# EAGLE board oshcamp23_badge_rev_a2_single_sheet (EAGLE 9.6.2)
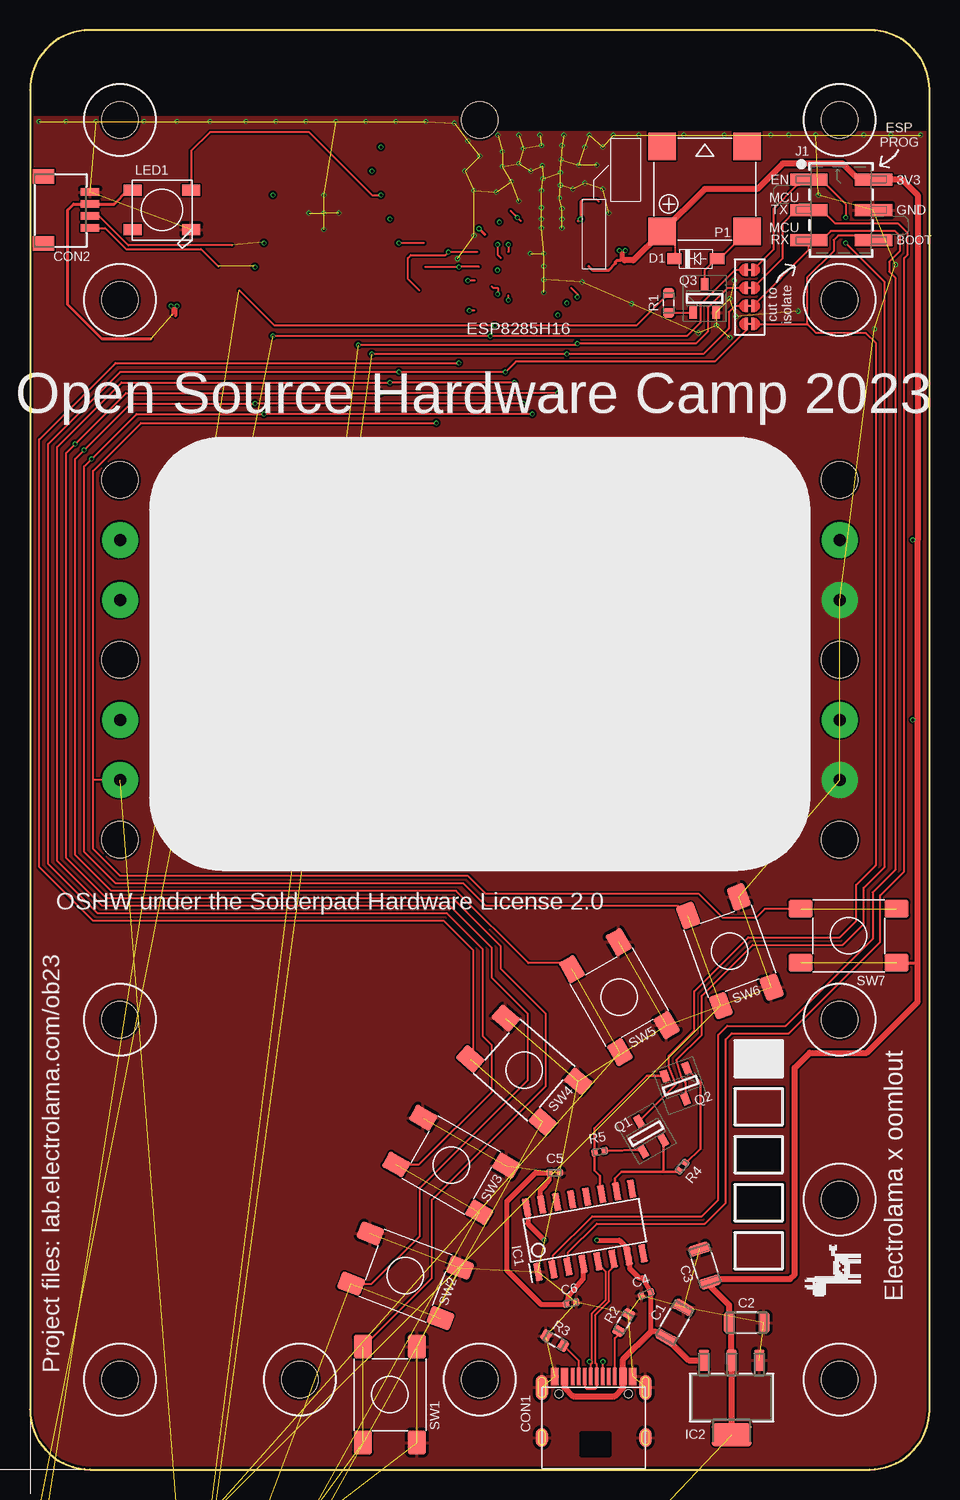
[diagram p0: board, top side]
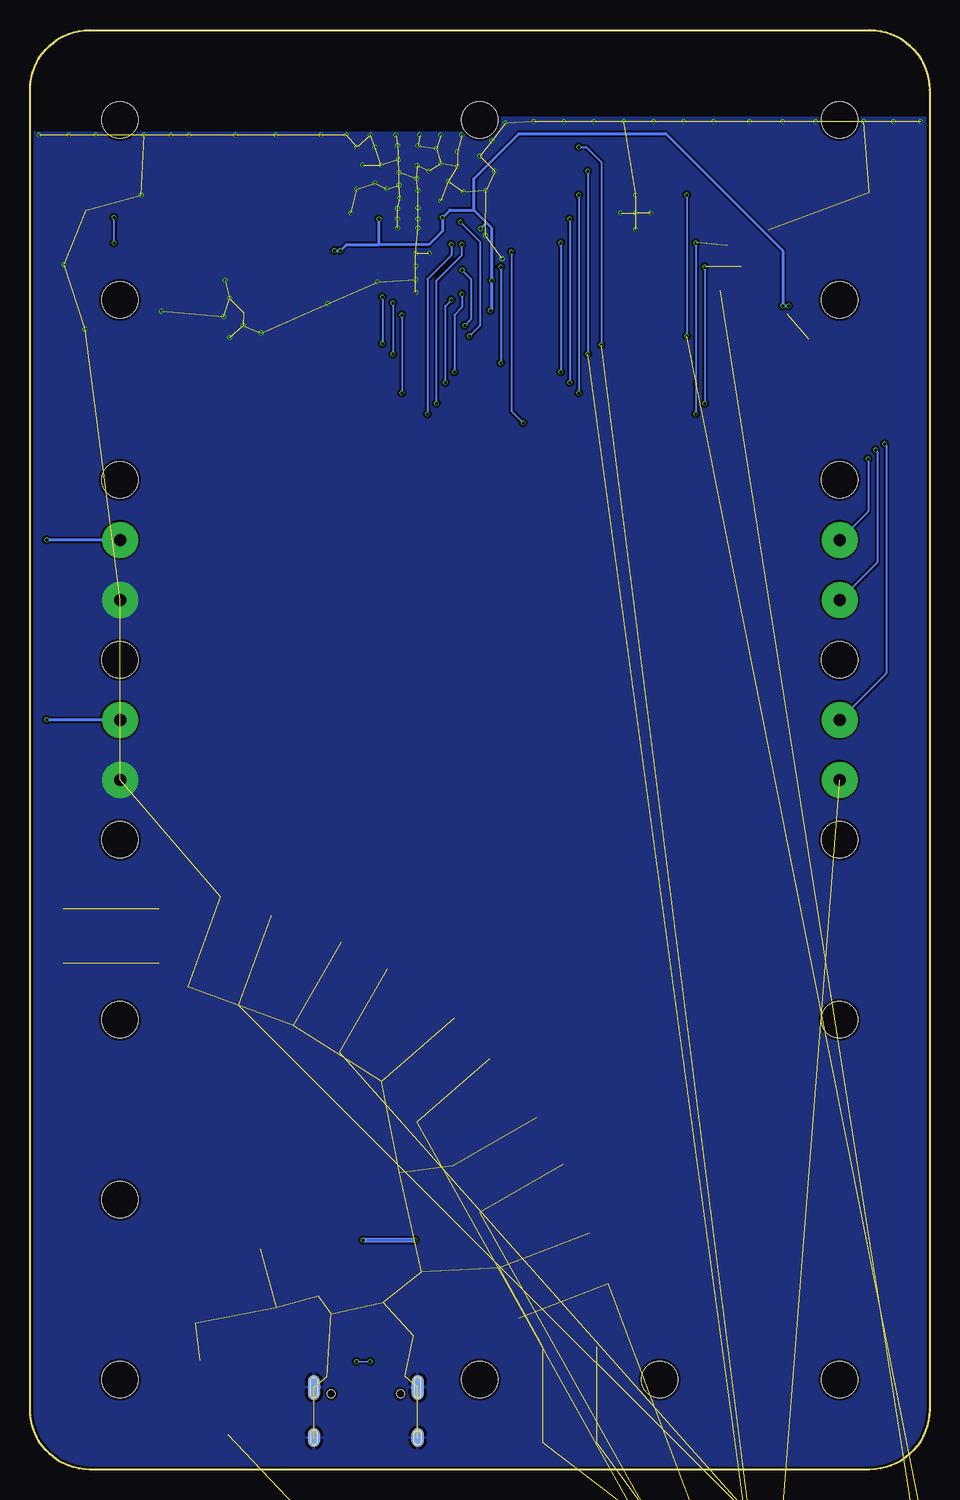
[diagram p1: board, bottom side, seen from below]

Size 75 x 120 mm. Coordinates in mm from the lower left corner, seen from the top.
Outline: 70,120 5,120 arc90 0,115 0,5 arc90 5,0 70,0 arc90 75,5 75,115 arc90 70,120
Copper layers (1*16): Top 0.035mm / dielectric 1.6mm / Bottom 0.035mm
Design rules "jlcpcb-2layers *": minimum track width 5mil, minimum drill 0.3mm, track to track 5mil, track to pad 5mil, pad to pad 5mil, via to via 5mil, smd to smd 5mil, copper to edge 0.2mm, drill to drill 6mil, minimum pad ring 10mil, minimum via ring 3mil, stop-mask expansion 4mil, vias tented up to drill 100mil, thermal gap 10mil
Holes 3.05 mm at 7.5,7.5 22.5,7.5 37.5,7.5 67.5,7.5 67.5,22.5 67.5,37.5 67.5,97.5 67.5,112.5 7.5,112.5 7.5,97.5 7.5,37.5 67.5,82.5 67.5,67.5 67.5,52.5 7.5,82.5 7.5,67.5 7.5,52.5 37.5,112.5
tRestrict: area 58.7,20.7 to 62.8,23.8; area 58.9,24.9 to 62.6,27.6; area 46,1.2 to 48.2,3

## Footprints (pad centres in the part's own frame; a part is rotated, then mirrored left to right if it is on the bottom)
YAGEO-ANT3216LL00R2400A = smd 1.8 x 0.6: S1 0,2.15; S2 0,5.35
_PKG_C_1206 = smd 0.9 x 1.7: 1 -1.45,0; 2 1.45,0
_PKG_C_0402 = smd 0.54 x 0.6: 1 -0.43,0; 2 0.43,0
_PKG_C_0402_NOTHERMALS = smd 0.54 x 0.6: 1 -0.43,0; 2 0.43,0
USBC_C-31-M-12 = smd 0.3 x 1.45: CC1 -1.25,3.005; CC2 1.75,3.005; DN1 0.25,3.005; DN2 -0.75,3.005; DP1 -0.25,3.005; DP2 0.75,3.005; SBU1 1.25,3.005; SBU2 -1.75,3.005 | smd 0.6 x 1.45: GND@1 -3.25,3.005; GND@2 3.25,3.005; VBUS@1 -2.45,3.005; VBUS@2 2.45,3.005 | smd 1 x 2.1: P$1 4.32,2.09; P$2 -4.32,2.09 | smd 1 x 1.6: P$3 -4.32,-2.09; P$4 4.32,-2.09 | smd 1 x 2.1 bottom: P$5 -4.32,2.09; P$8 4.32,2.09 | smd 1 x 1.6 bottom: P$6 -4.32,-2.09; P$7 4.32,-2.09 | hole 0.65: 2.89,1.56; -2.89,1.56
JST_SH4 = smd 0.6 x 1.55: 1 -1.5,2.514; 2 -0.5,2.514; 3 0.5,2.514; 4 1.5,2.514 | smd 1.2 x 1.8: MT1 -2.8,-1.386; MT2 2.8,-1.386
_PKG_SOD123 = smd 1.2 x 0.9: 1 -1.775,0; 2 1.775,0
_PKG_SOP16 = smd 0.61 x 1.524: 1 -4.445,-2.794; 2 -3.175,-2.794; 3 -1.905,-2.794; 4 -0.635,-2.794; 5 0.635,-2.794; 6 1.905,-2.794; 7 3.175,-2.794; 8 4.445,-2.794; 9 4.445,2.667; 10 3.175,2.667; 11 1.905,2.667; 12 0.635,2.667; 13 -0.635,2.667; 14 -1.905,2.667; 15 -3.175,2.667; 16 -4.445,2.667
_PKG_SOT223-4_TI-DCY4 = smd 0.889 x 1.765: 1 -2.311,-3.118; 2 0,-3.118; 3 2.311,-3.118 | smd 3.302 x 1.905: 4 0,3.124
QFN50P500X500X90-33N = smd 0.8 x 0.3: 1 -2.5,1.75; 2 -2.5,1.25; 3 -2.5,0.75; 4 -2.5,0.25; 5 -2.5,-0.25; 6 -2.5,-0.75; 7 -2.5,-1.25; 8 -2.5,-1.75; 17 2.5,-1.75; 18 2.5,-1.25; 19 2.5,-0.75; 20 2.5,-0.25; 21 2.5,0.25; 22 2.5,0.75; 23 2.5,1.25; 24 2.5,1.75 | smd 0.3 x 0.8: 9 -1.75,-2.5; 10 -1.25,-2.5; 11 -0.75,-2.5; 12 -0.25,-2.5; 13 0.25,-2.5; 14 0.75,-2.5; 15 1.25,-2.5; 16 1.75,-2.5; 25 1.75,2.5; 26 1.25,2.5; 27 0.75,2.5; 28 0.25,2.5; 29 -0.25,2.5; 30 -0.75,2.5; 31 -1.25,2.5; 32 -1.75,2.5 | smd 3.75 x 3.75: 33 0,0
61030621121 = smd 1 x 3.1: 1 -2.54,-2.7; 2 -2.54,2.7; 3 0,-2.7; 4 0,2.7; 5 2.54,-2.7; 6 2.54,2.7
_PKG_L_0402 = smd 0.54 x 0.6: 1 -0.43,0; 2 0.43,0
WS2812B = smd 1.5 x 0.9: 1-VDD 2.45,-1.65; 2-DOUT 2.45,1.65; 3-GND -2.45,1.65; 4-DIN -2.45,-1.65
ESP-12S = smd 2 x 1.2: ADC -7.9,1.5; EN -7.9,-0.5; GND 7.9,-10.5; IO0 7.9,-4.5; IO2 7.9,-6.5; IO4 7.9,-2.5; IO5 7.9,-0.5; IO12 -7.9,-6.5; IO13 -7.9,-8.5; IO14 -7.9,-4.5; IO15 7.9,-8.5; IO16 -7.9,-2.5; RST -7.9,3.5; RXD/IO3 7.9,1.5; TXD/IO1 7.9,3.5; VCC -7.9,-10.5 | smd 3.6 x 3.6: EPAD -0.5,-2
MLT-8530 = smd 2.3 x 2.3: + -3.55,3.55; - -3.55,-3.55; DUMMY1 3.55,3.55; DUMMY2 3.55,-3.55
SOT96P237X111-3N = smd 1 x 0.6: 1 -1.2,0.955; 2 -1.2,-0.955; 3 1.2,0
_PKG_R_0603 = smd 0.79 x 0.93: 1 -0.82,0; 2 0.82,0
_PKG_R_0402 = smd 0.54 x 0.6: 1 -0.43,0; 2 0.43,0
SJ-SHORT = smd 0.254 x 1.016: 1 -0.254,0; 2 0.254,0 | smd 0.508 x 0.152: S 0,0
GENERIC_SPNO_4P_6X6MM = smd 2 x 1.5: P$1 -4,2.25; P$2 4,2.25; P$3 -4,-2.25; P$4 4,-2.25
XTAL-4P-2016 = smd 0.95 x 0.85: 1 -0.725,-0.575; 2 0.725,-0.575; 3 0.725,0.575; 4 -0.725,0.575

## Placement (x,y rotation side)
ANT2  ANT3216LL00R2400A  [YAGEO-ANT3216LL00R2400A]  22.25,-13.75 0 top  (outside the outline)
C1  47u  [_PKG_C_1206]  53.75,12.25 60 top
C2  47u  [_PKG_C_1206]  59.75,12.25 0 top
C3  47u  [_PKG_C_1206]  56.25,17 108 top
C4  100n  [_PKG_C_0402]  51.38,14.62 200 top
C5  100n  [_PKG_C_0402]  43.75,24.75 0 top
C6  100n  [_PKG_C_0402]  45.12,13.88 10 top
C21  TBD  [_PKG_C_0402_NOTHERMALS]  14,-42.25 0 top  (outside the outline)
C22  TBD  [_PKG_C_0402_NOTHERMALS]  16.5,-42.25 0 top  (outside the outline)
C23  8p  [_PKG_C_0402]  19,-42.25 0 top  (outside the outline)
C24  8p  [_PKG_C_0402]  21.5,-42.25 0 top  (outside the outline)
C25  4u7  [_PKG_C_0402_NOTHERMALS]  24,-42.25 0 top  (outside the outline)
C26  100n  [_PKG_C_0402_NOTHERMALS]  26.5,-42.25 0 top  (outside the outline)
C27  4u7  [_PKG_C_0402_NOTHERMALS]  -5.5,-45.25 0 top  (outside the outline)
C28  100n  [_PKG_C_0402_NOTHERMALS]  -3,-45.25 0 top  (outside the outline)
C29  100n  [_PKG_C_0402_NOTHERMALS]  -0.5,-45.25 0 top  (outside the outline)
C30  100n  [_PKG_C_0402_NOTHERMALS]  2,-45.25 0 top  (outside the outline)
C31  100n  [_PKG_C_0402]  4.5,-45.25 0 top  (outside the outline)
C32  100n  [_PKG_C_0402_NOTHERMALS]  7,-45.25 0 top  (outside the outline)
C33  47u  [_PKG_C_1206]  21,-33 0 top  (outside the outline)
C34  47u  [_PKG_C_1206]  26,-33 0 top  (outside the outline)
CON1  [USBC_C-31-M-12]  47,4.75 0 top
CON2  STEMMA_I2C_QT  [JST_SH4]  2.5,105 270 top
D1  [_PKG_SOD123]  55.5,100.94 0 top
IC1  [_PKG_SOP16]  46.25,20 10 top
IC2  LD1117-3.3  [_PKG_SOT223-4_TI-DCY4]  58.5,6 180 top
IC4  WMCU-ESP8285H16  [QFN50P500X500X90-33N]  2.25,-36 0 top  (outside the outline)
J1  61030621121  [61030621121]  67.62,105 270 top
L2  TBD  [_PKG_L_0402]  9.5,-45.25 0 top  (outside the outline)
LED1  WS2812B5050  [WS2812B]  11,105 180 top
MOD2  ESP-12S  [ESP-12S]  6,-16.25 0 top  (outside the outline)
P1  Buzzer  [MLT-8530]  56.25,106.75 90 top
Q1  SS8050  [SOT96P237X111-3N]  51.38,28 120 top
Q2  SS8050  [SOT96P237X111-3N]  54.25,32 290 top
Q3  SS8050  [SOT96P237X111-3N]  56.25,97.62 90 top
R1  220  [_PKG_R_0603]  53.25,97.25 90 top
R2  5k1  [_PKG_R_0603]  49.5,12.25 240 top
R3  5k1  [_PKG_R_0603]  43.75,10.75 330 top
R4  12k 1%  [_PKG_R_0402]  54.38,25.25 50 top
R5  12k 1%  [_PKG_R_0402]  47.5,26.5 190 top
R12  12k 1%  [_PKG_R_0402]  -5.5,-42.25 0 top  (outside the outline)
R13  12k 1%  [_PKG_R_0402]  -2.25,-42.25 0 top  (outside the outline)
R14  12k 1%  [_PKG_R_0402]  1,-42.25 0 top  (outside the outline)
R15  12k 1%  [_PKG_R_0402]  4.25,-42.25 0 top  (outside the outline)
R16  12k 1%  [_PKG_R_0402]  7.5,-42.25 0 top  (outside the outline)
R17  12k 1%  [_PKG_R_0402]  10.75,-42.25 0 top  (outside the outline)
SJ1  [SJ-SHORT]  60,100 0 top
SJ2  [SJ-SHORT]  60,98.5 0 top
SJ3  [SJ-SHORT]  60,97 0 top
SJ4  [SJ-SHORT]  60,95.5 180 top
SW1  [GENERIC_SPNO_4P_6X6MM]  30,6.25 90 top
SW2  [GENERIC_SPNO_4P_6X6MM]  31.3,16.15 159 top
SW3  [GENERIC_SPNO_4P_6X6MM]  35.12,25.38 150 top
SW4  [GENERIC_SPNO_4P_6X6MM]  41.2,33.3 139 top
SW5  [GENERIC_SPNO_4P_6X6MM]  49.13,39.38 120 top
SW6  [GENERIC_SPNO_4P_6X6MM]  58.35,43.2 110 top
SW7  [GENERIC_SPNO_4P_6X6MM]  68.25,44.5 0 top
XT2  26MHz  [XTAL-4P-2016]  13.25,-34 0 top  (outside the outline)

## Library data of the parts
ANT2 = ok-rf-dev; JLCASSY: C293767
C1-C3 C33 C34 = ok-discretes-dev; JLCASSY: C96123; MPN: CL31A476MPHNNNE
C4-C6 C26 C28-C32 = ok-discretes-dev; JLCASSY: C307331
C21 C22 L2 = ok-discretes-dev
C23 C24 = ok-discretes-dev; JLCASSY: C1578
C25 C27 = ok-discretes-dev; JLCASSY: C23733
CON1 = ok-connectors-dev; JLCASSY: C165948
CON2 = microbuilder; JLCASSY: C145956
D1 = ok-discretes-dev; JLCASSY: C81598
IC1 = ok-chips-dev; JLCASSY: C2844153
IC2 = ok-chips-dev; JLCASSY: C6186
IC4 = ok-chips-dev; DESCRIPTION: IC RF TXRX+MCU WIFI 32VFQFN; HEIGHT: 0.9mm; JLCASSY: C967019; MANUFACTURER_NAME: Espressif Systems; MANUFACTURER_PART_NUMBER: ESP8285H16; MOUSER_PART_NUMBER: 356-ESP8285H16; MOUSER_PRICE-STOCK: https://www.mouser.co.uk/ProductDetail/Espressif-Systems/ESP8285H16?qs=Cb2nCFKsA8p%2FOZGxIdZOag%3D%3D
J1 = Wurth_Connectors_WR-PHD; DATASHEET-URL: https://www.we-online.com/redexpert/spec/61030621121?ae; GENDER: Pin Header; IR: 3A; JLCASSY: C780054; MOUNT: THT; PACKAGING: Tape and Reel with Cap; PART-NUMBER: 61030621121; PINS: 6; PITCH: 2.54mm; ROWS: Dual; TYPE: Straight
LED1 = adafruit
MOD2 = ok-modules-dev; JLCASSY: C82898
P1 = ok-electromech-dev; JLCASSY: C94599
Q1-Q3 = ok-discretes-dev; ARROW_PART_NUMBER: MMBT5550LT1G; ARROW_PRICE-STOCK: https://www.arrow.com/en/products/mmbt5550lt1g/on-semiconductor?region=nac; HEIGHT: 1.11mm; JLCASSY: C2150; MANUFACTURER_NAME: ON Semiconductor; MANUFACTURER_PART_NUMBER: MMBT5550LT1G; MOUSER_PART_NUMBER: 863-MMBT5550LT1G; MOUSER_PRICE-STOCK: https://www.mouser.co.uk/ProductDetail/onsemi/MMBT5550LT1G?qs=R2UZ7gjkEjKW3fmkaqXxTw%3D%3D
R1 = ok-discretes-dev; JLCASSY: C22962
R2 R3 = ok-discretes-dev; JLCASSY: C23186
R4 R5 R12-R17 = ok-discretes-dev; JLCASSY: C25752
SJ1-SJ4 = ok-mechanical-dev
SW1-SW7 = ok-electromech-dev; JLCASSY: C620316
XT2 = ok-xtal-osc-dev; JLCASSY: C2762193

## Nets
ANT1: C22.2 IC4.2 L2.2
ANT'1: ANT2.S1 C21.2 L2.1
AUTORST_BOOT: J1.6 Q1.3 SJ4.1
AUTORST_EN: J1.1 Q2.3 SJ1.2
CH343_3V: C5.1 C6.1 IC1.4 IC1.15
DTR: IC1.10 Q1.2 R4.1
EN: IC4.7 MOD2.EN R13.2 SJ1.1
GND: C1.2 C2.2 C3.2 C4.2 C5.2 C6.2 C21.1 C22.1 C23.1 C24.1 C25.1 C26.1 C27.1 C28.1 C29.1 C30.1 C31.2 C32.1 C33.2 C34.2 CON1.GND@1 CON1.GND@2 CON1.P$1 CON1.P$2 CON1.P$3 CON1.P$4 CON1.P$5 CON1.P$6 CON1.P$7 CON1.P$8 CON2.1 IC1.1 IC2.1 IC4.33 J1.4 LED1.3-GND MOD2.EPAD MOD2.GND Q3.2 R2.1 R3.1 R12.2 R16.1 SW1.P$3 SW1.P$4 SW2.P$3 SW2.P$4 SW3.P$3 SW3.P$4 SW4.P$3 SW4.P$4 SW5.P$3 SW5.P$4 SW6.P$3 SW6.P$4 XT2.2 XT2.4
IO0: IC4.15 MOD2.IO0 R14.2 SJ4.2 SW3.P$1 SW3.P$2
IO1_TX: IC4.26 MOD2.TXD/IO1 SJ2.1
IO2: IC4.14 MOD2.IO2 R15.2 SW4.P$1 SW4.P$2
IO3_RX: IC4.25 MOD2.RXD/IO3 SJ3.1
IO4: IC4.16 MOD2.IO4 SW2.P$1 SW2.P$2
IO5: IC4.24 LED1.4-DIN MOD2.IO5 SW1.P$1 SW1.P$2
IO12: CON2.4 IC4.10 MOD2.IO12 SW5.P$1 SW5.P$2
IO13: IC4.12 MOD2.IO13 R1.2
IO14: CON2.3 IC4.9 MOD2.IO14 SW6.P$1 SW6.P$2
IO15: IC4.13 MOD2.IO15 R16.2 SW7.P$1 SW7.P$2
N$1: IC4.31 R12.1
N$5: Q1.1 R5.1
N$12: D1.2 P1.- Q3.3
N$13: Q2.1 R4.2
N$16: CON1.CC1 R3.2
N$17: CON1.CC2 R2.2
N$23: Q3.1 R1.1
PC_RX: IC1.3 J1.3 SJ2.2
PC_TX: IC1.2 J1.5 SJ3.2
RST_C: C30.2 IC4.32 R17.1
RST_M: MOD2.RST
RTS: IC1.11 Q2.2 R5.2
USB_N: CON1.DN1 CON1.DN2 IC1.6
USB_P: CON1.DP1 CON1.DP2 IC1.5
VCC: C2.1 C3.1 C25.2 C26.2 C27.2 C28.2 C29.2 C31.1 C32.2 C33.1 C34.1 CON2.2 D1.1 IC2.2 IC2.4 IC4.1 IC4.3 IC4.4 IC4.11 IC4.17 IC4.29 IC4.30 J1.2 LED1.1-VDD MOD2.VCC P1.+ R13.1 R14.1 R15.1 R17.2 SW7.P$3 SW7.P$4
VUSB: C1.1 C4.1 CON1.VBUS@1 CON1.VBUS@2 IC1.7 IC1.16 IC2.3
XTAL_IN: C23.2 IC4.28 XT2.1
XTAL_OUT: C24.2 IC4.27 XT2.3

## Tracks (layer width: path | path; a pad name or v marks a point on that pad's centre or on a via)
ANT1  (2 unrouted)
ANT'1  (2 unrouted)
AUTORST_BOOT
  Top 0.152: Q1.3 53.84,32.11 53.25,33.57 53.25,34.5 55.38,36.62 55.38,39.88 59.88,44.38 67.5,44.38 68.88,45.75 68.88,48.75 70.5,50.38 70.5,93.94 69.69,94.75 65.57,94.75 64.82,95.5 | SJ4.1 64.82,95.5 | J1.6 69.29,102.46 68.88,102.88 67.38,102.88 67,102.5 67,101.56 64.82,99.38 64.82,95.5
AUTORST_EN  (via drill 0.25)
  Top 0.152: SJ1.2 62,101.75 62,105.12 63.91,107.04 J1.1 65.96,107.54 68,105.5 v68,104.38 | Q2.3 54.66,32.29 54.33,32.73 53.92,34.17 56,36.25 56,39.5 60.25,43.75 67.75,43.75 69.5,45.5 69.5,48.5 71.25,50.25 71.25,99 v68,102.25
  Bottom 0.152: v68,102.25 v68,104.38
CH343_3V
  Top 0.406: IC1.15 42.53,22.2 42.53,23.29 42.93,23.68 43.25,24.12 C5.1 42.12,24.75 39.75,22.38 39.75,16.62 42.64,13.73 44.63,13.73 C6.1 44.88,14.5 46.11,15.89 IC1.4
DTR
  Top 0.2: IC1.10 48.79,23.3 48.79,24.29 49.3,24.8 52.75,24.8 | R4.1 53.98,24.8 52.75,24.8 | 52.75,24.8 52.8,24.85 Q1.2
EN  (via drill 0.25)  (3 unrouted)
  Top 0.152: SJ1.1 58.75,100 55.88,97.12 55.88,95.62 54.75,94.5 v38.38,94.5 v20.25,94.5 | 39.2,104.07 v39.12,104 | 20.2,106.3 v20.25,106.25
  Bottom 0.152: v39.12,104 37.5,102.38 37.5,95.38 v38.38,94.5 | v20.25,106.25 v20.25,94.5
GND  (via drill 0.25, 1 pad 3)  (146 unrouted)
  other vias: 44.35,103.5 42.65,103.5 42.5,111.25 44.5,111.25 40.75,111.25 36.5,110.75 35.38,112.25 39,111.25 33,112.38 30.5,112.38 28,112.38 25.5,112.38 23,112.38 20.5,112.38 18,112.38 15,112.38 12.25,112.38 9.5,112.38 5.5,112.38 0.75,112.38 3,112.38 46.62,111.25 48.62,111.25 50.75,111.25 54.5,111.25 57.88,111.25 61.75,111.25 63.25,111.25 65.5,111.25 69.5,111.25 74.25,111.25 71.75,111.25 42.65,104.25 42.65,105.19 44.35,105.12 44.35,104.25 42.65,106.62 42.77,107.62 42.71,108.69 44.16,106 44.23,107.06 44.23,108.12 44.29,109.19 44.35,110.38 42.65,110.38 46.04,99 67.5,57.5 67.5,72.5 41.71,101.38 42.84,100.31 42.84,99.19 42.84,98.12 42.84,101.38 50.16,97.19 57.23,95.38 35.65,100.94 37.02,102.88 58.35,97.62 64.04,96.56 70.41,95.06 72.16,100.44 39.38,109.88 41.12,110.12 39.38,108.62 41.75,108.25 40.75,108.88 38.88,106.5 40.75,105.75 45.25,106.75 46.25,107.25 45.75,108.75 46.25,110.25 47.75,110.25 47.25,108.75 47.75,106.75 48.25,104.75 37.5,109.5 36.25,108.25 37,106.62 25.75,104.75 23.25,104.75 24.5,106.25 24.5,103.38 24.5,104.75 55.73,94.75 58.73,99.12 58.85,96.12 58.35,94.38 40.12,107.38 65.72,106.25
  pour Top (isolate 0.153, rank 6): 0,0 75,0 75,111.5 38.25,111.5 37,112.75 0,112.75
  pour Bottom (isolate 0.152, rank 6): 0,0 75,0 75,111.5 38.25,111.5 37,112.75 0,112.75
IO0  (via drill 0.25)  (4 unrouted)
  Top 0.152: 38.5,98.62 38.62,98.5 39,98.5 v39,98 | SW3.P$2 32.43,25.43 38.5,31.5 38.5,35.38 37.75,36.12 37.75,43.38 34.75,46.38 5.62,46.38 1.5,50.5 1.5,85.5 7.5,91.5 v30.75,91.5 v39.62,91.5 40.5,92.38 57.12,92.38 59.75,95 SJ4.2 | 32.85,102.25 v30.75,102.25
  Bottom 0.152: v39,98 39,96.88 39.62,96.25 v39.62,91.5 | v30.75,102.25 v30.75,91.5
IO1_TX  (via drill 0.25)  (2 unrouted)
  Top 0.152: SJ2.1 58.12,98.5 56.5,96.88 56.5,94.88 55.5,93.88 v45.62,93.88 45.5,93.75 v27.38,93.75 | v45.62,97.75 45.62,98 45.12,98.5 | v29.25,110.25 29.3,110.3
  Bottom 0.152: v45.62,97.75 v45.62,93.88 | v29.25,110.25 28.62,110.25 27.38,109 v27.38,93.75
IO2  (via drill 0.25)  (4 unrouted)
  Top 0.152: SW4.P$2 36.95,34.48 36.95,43.3 34.5,45.75 5.25,45.75 0.75,50.25 0.75,85.88 7.12,92.25 v35.75,92.25 | 37.43,100.25 v35.75,100.25 32.95,100.25
  Bottom 0.152: v35.75,100.25 v35.75,92.25
IO3_RX  (via drill 0.25)  (2 unrouted)
  Top 0.152: 28.55,108.3 v28.5,108.25 | v28.5,93 v44.75,93 56.12,93 58.25,95.12 58.25,96.5 58.75,97 SJ3.1
  Bottom 0.152: v44.75,97.25 v44.75,93 | v28.5,108.25 v28.5,93
IO4  (via drill 0.25)  (3 unrouted)
  Top 0.152: SW2.P$2 28.48,15.48 32.5,19.5 32.5,23.5 41.5,32.5 41.5,38 38.5,41 38.5,43.5 35,47 6,47 2.25,50.75 2.25,85.25 7.62,90.62 v30,90.62 v40.38,90.62 | v39.88,97.5 39.88,97.88 | 30.05,104.3 v30,104.25
  Bottom 0.152: v40.38,90.62 40.38,97 v39.88,97.5 | v30,104.25 v30,90.62
IO5  (via drill 0.25, 1 pad 3)  (3 unrouted)
  Top 0.152: SW1.P$2 33.5,16 33.5,22.5 43,32 43,38 39.25,41.75 39.25,43.62 35.25,47.62 6.38,47.62 3,51 3,84.75 v3.75,85.5 8,89.75 v29.25,89.75 v44,89.75 | 29.3,106.3 v29.25,106.25 28.5,106.25 23.25,111.5 15,111.5 13.45,109.95 LED1.4-DIN
  Bottom 0.152: v3.75,85.5 3.62,85.38 3.62,66.38 v7.5,62.5 | v44,96.25 v44,89.75 | v29.25,106.25 v29.25,89.75
IO12  (via drill 0.25, 1 pad 3)  (4 unrouted)
  Top 0.152: 39.25,101 39,101.25 v39,102.12 | SW5.P$2 44.68,42.22 41.56,42.22 35.53,48.25 6.75,48.25 3.75,51.25 3.75,84.25 v4.5,85 8.38,88.88 v18.75,88.88 v41.12,88.88 | CON2.4 6.25,103.5 8,101.75 14.25,101.75 15.7,100.3 | 18.7,100.3 v18.75,100.25
  Bottom 0.152: v4.5,85 4.38,84.88 4.38,75.62 v7.5,72.5 | v39,102.12 39,101.25 41.12,99.12 v41.12,88.88 | v18.75,100.25 v18.75,88.88
IO13  (via drill 0.25)  (2 unrouted)
  Top 0.152: R1.2 50.55,95.38 v38.75,95.38 20.38,95.38 17.45,98.3
  Bottom 0.152: v38.98,100 38.23,99.25 38.23,95.9 v38.75,95.38
IO14  (via drill 0.25, 1 pad 3)  (4 unrouted)
  Top 0.152: v39.88,102.12 39.88,101.5 | SW6.P$2 54.06,47 38,47 36.12,48.88 7.12,48.88 4.5,51.5 4.5,83.62 v5.12,84.25 8.88,88 v19.5,88 v41.88,88 | 16.85,102.05 8.2,102.05 5.75,104.5 CON2.3 | 19.45,102.3 v19.5,102.25
  Bottom 0.152: v5.12,84.25 5.12,79.88 v7.5,77.5 | v39.88,102.12 39.88,101.25 41.88,99.25 v41.88,88 | v19.5,102.25 v19.5,88
IO15  (via drill 0.25, 1 pad 3)  (4 unrouted)
  Top 0.152: SW7.P$1 61.25,46.75 60.5,46 57.75,46 55.75,48 38,48 36.5,49.5 7.5,49.5 5.25,51.75 5.25,57.5 | 5.25,57.5 5.25,83.25 9.25,87.25 v33.88,87.25 | v7.5,57.5 5.25,57.5 | 37.3,101.5 v34.88,101.5 34.62,101.25 31.75,101.25 31.5,101 31.5,99.25 32.45,98.3
  Bottom 0.152: v34.88,101.5 34.88,88.25 v33.88,87.25
N$1  (1 unrouted)
N$3
  pour Top: 58.75,31.75 58.75,28.75 62.75,28.75 62.75,31.75
N$5
  Top 0.2: R5.1 50.99,26.64 Q1.1
N$10
  pour Top: 58.75,19.75 58.75,16.75 62.75,16.75 62.75,19.75
N$12
  Top 0.152: Q3.3 56.25,100 57.19,100.94 D1.2 57.52,100.94 59.79,103.2 P1.-
N$13
  Top 0.2: Q2.1 55.88,32.32 55.88,26.75 54.7,25.58 R4.2
N$16
  Top 0.152: CON1.CC1 45.75,9.05 R3.2
N$17
  Top 0.152: CON1.CC2 48.75,10.95 49.09,11.29 R2.2
N$23
  Top 0.152: R1.1 Q3.1
PC_RX
  Top 0.152: IC1.3 44.86,18.11 47.25,20.5 56.25,20.5 58,22.25 58,35.88 58.5,36.38 63.25,36.38 70.88,44 70.88,47.88 72.88,49.88 72.88,101 73.13,101.25 73.13,103.12 72.38,103.88 67.12,103.88 66.06,104.94 64.91,104.94 | SJ2.2 62.75,101 62.75,103.88 63.82,104.94 64.91,104.94 | 64.91,104.94 J1.3
PC_TX
  Top 0.152: IC1.2 43.61,17.86 46.88,21.12 56,21.12 57.38,22.5 57.38,36.25 58.12,37 63,37 70.25,44.25 70.25,48.12 72.12,50 72.12,99.38 71.62,99.88 71.62,100.69 72.5,101.56 72.5,102.88 72.12,103.25 66.75,103.25 65.96,102.46 J1.5 64.92,101.67 SJ3.2
RST_C  (2 unrouted)
RTS
  Top 0.2: IC1.11 47.54,23.08 47.54,24.46 47.07,24.93 47.07,26.42 | 47.07,26.42 R5.2 | Q2.2 51.43,32.8 47.07,28.44 47.07,26.42
USB_N
  Top 0.152: IC1.6 48.61,16.86 48.28,16.53 48.28,14.03 47.14,12.89 47.14,8.89 47.25,8.79 CON1.DN1 47.25,6.88 47.12,6.75 46.38,6.75 46.25,6.88 CON1.DN2
USB_P  (via drill 0.25)
  Top 0.152: CON1.DP1 46.75,8.79 46.86,8.89 46.86,9 | 46.86,9 46.86,13.01 48,14.14 48,16.5 47.36,17.14 IC1.5 | CON1.DP2 47.75,9 v47.78,9 | v46.63,9 46.86,9
  Bottom 0.152: v47.78,9 46.66,9.03 v46.63,9
VCC  (via drill 0.25, 1 pad 3)  (23 unrouted)
  Top 0.152: 74,62.5 v73.62,62.5 | 74,77.5 v73.62,77.5 | 40.93,104.07 v40.62,104.38 40.07,104.93 | 37.07,99.12 v36.5,99.12 | 37.05,96.62 v36.62,96.62 | 47.43,105.69 47.25,105.88 46.12,105.88 45.9,105.65 v45.9,104.25 | 52.62,103.12 53,103.12 53.75,102.38 53.75,100.96 D1.1
  Top 0.254: 46.57,100.31 46.88,100 48.25,100 48.81,100.56 48.81,100.69 48.92,100.8 49.25,100.8 49.25,101.5 v49.12,101.62 | v49.62,101.62 49.44,101.44 49.44,100.92 49.56,100.8 | v45.9,104.25 45.72,104.07 | v11.75,97 11.88,96.88 11.88,96.3 | v12.25,97 12.12,96.88 12.12,96.17 | 10.07,94.25 6,94.25 3.12,97.12 3.12,105 3.62,105.5 CON2.2 7,105.5 8.15,106.65 LED1.1-VDD | 37.93,102.94 v37.44,103.44 | SW7.P$4 74,42.25
  Top 0.508: IC2.4 IC2.2 58.42,9.19 58.42,12.12 C2.1 58.3,13.7 56.7,15.3 C3.1 56.95,15.87 63.37,15.87 63.75,16.25 63.75,33.5 65,34.75 69.75,34.75 74,39 74,42.25 74,62.5 74,77.5 74,106.25 72.71,107.54 J1.2 69.08,107.54 67.75,108.88 62.75,108.88 60.62,106.75 56.25,106.75 P1.+ 52.62,103.12 50.3,100.8 49.56,100.8
  Bottom 0.254: v67.5,77.5 v73.62,77.5 | v67.5,62.5 v73.62,62.5 | v36.62,96.62 36.5,96.75 v36.5,99.12 36.5,103.5 36.94,103.94 | 36.94,103.94 38,105 | 38,105 40,105 v40.62,104.38 40.62,103.25 41.75,102.12 45.9,102.12 | 45.9,102.12 48.62,102.12 v49.12,101.62 v49.62,101.62 | 45.9,102.12 v45.9,104.25 | 38,105 38,107.62 34.25,111.38 22,111.38 12.25,101.62 v12.25,97 v11.75,97 | v37.44,103.44 36.94,103.94
VUSB  (via drill 0.25)
  Top 0.406: IC1.16 41.5,21.76 41.5,20.5 v42.88,19.12 | v47.25,19.12 49.12,19.12 49.86,18.39 IC1.7 49.99,17.68 49.99,16.76 50.77,15.98 51.07,15.98 C4.1 51.78,11.53 51.78,11.5
  Top 0.508: 51.78,11.5 51.75,11.5 49.45,9.2 CON1.VBUS@2 49.45,6.83 48.75,6.12 45.27,6.12 44.55,6.85 CON1.VBUS@1 | IC2.3 54.9,9.12 C1.1 52.58,11.44 51.78,11.53
  Bottom 0.406: v42.88,19.12 v47.25,19.12
XTAL_IN  (2 unrouted)
XTAL_OUT  (2 unrouted)

## Text on the board
tPlace: ESP / PROG | 3V3 | EN | MCU | TX | GND | MCU | RX | BOOT | cut to / isolate | ESP8285H16 | Open Source Hardware Camp 2023 | OSHW under the Solderpad Hardware License 2.0 | Project files: lab.electrolama.com/ob23 | Electrolama x oomlout
Reference: CPWG 50 Ohm Params: / H=1.2mm, Er=4.6 (FR-4 standard) / W=0.92mm, G=0.1524mm / Calculated Z=50.0773 Ohms